# Altium PCB Full_Power_Board.PcbDoc
Units mil, origin at the board's own origin, x right, y up, seen from the top; angles counter-clockwise.
Board outline 6000 x 2850 mil, 4 copper layers (Signal Layer 1, Power Plane, Ground Plane, Signal Layer 2), stack 33.234 mil thick; 140 components, 95 nets, 531 pads, 92 vias.
Unrouted connection lines stored in the file: 1.
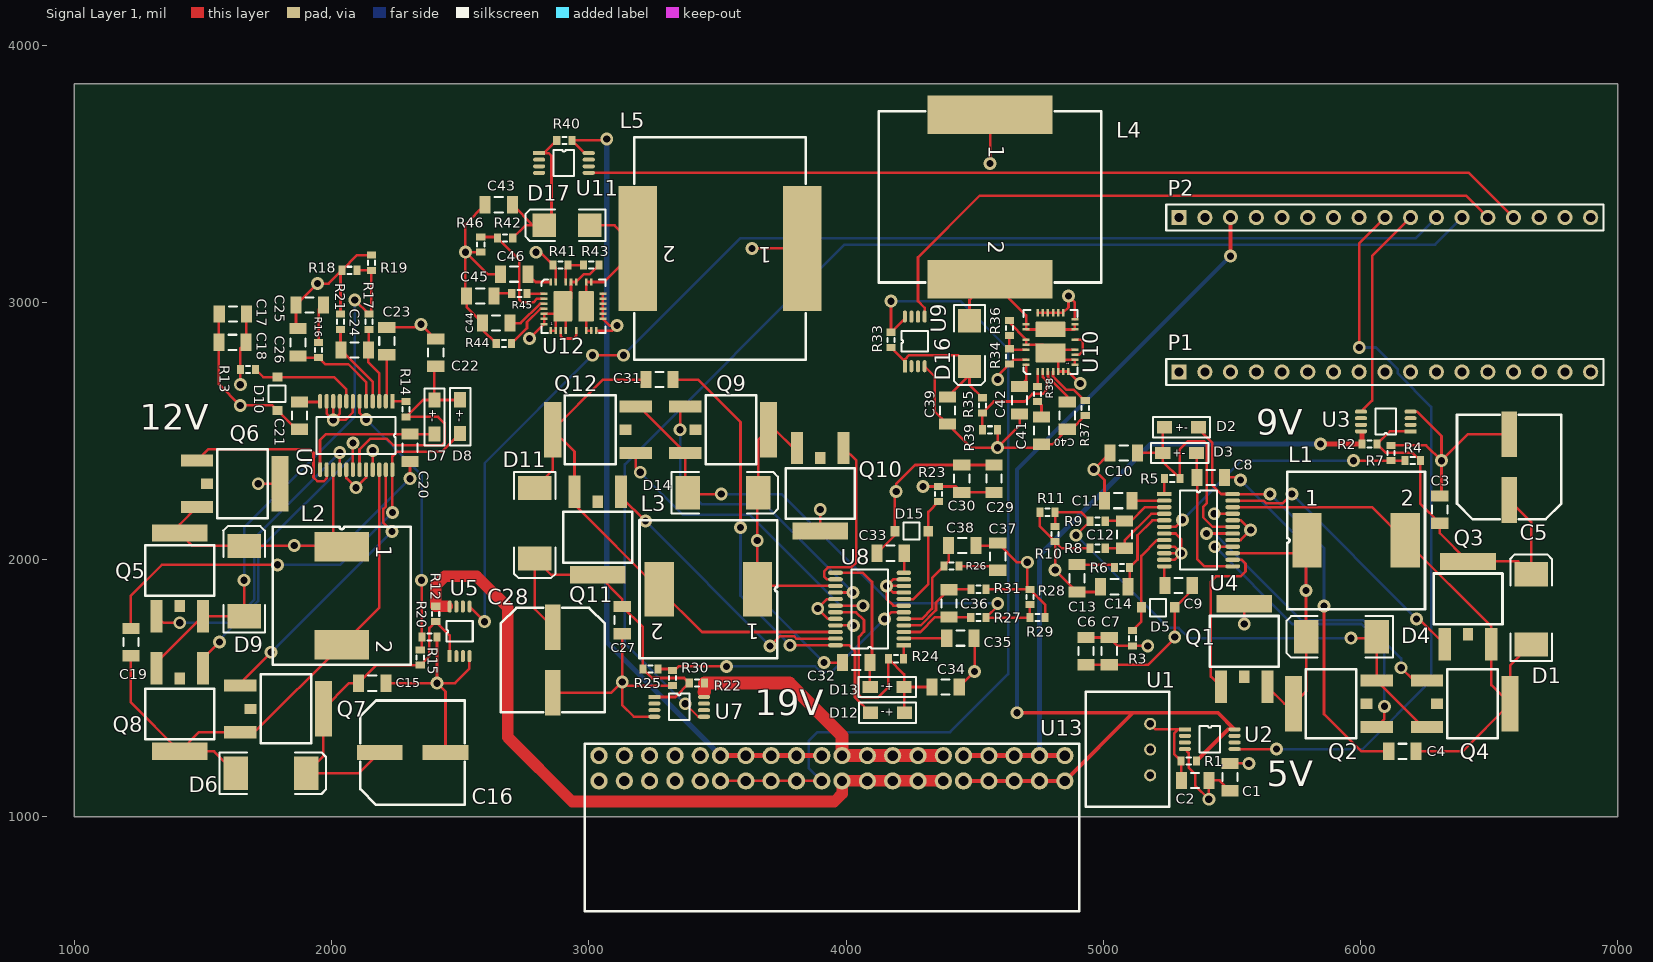
[diagram p0: Signal Layer 1 view]
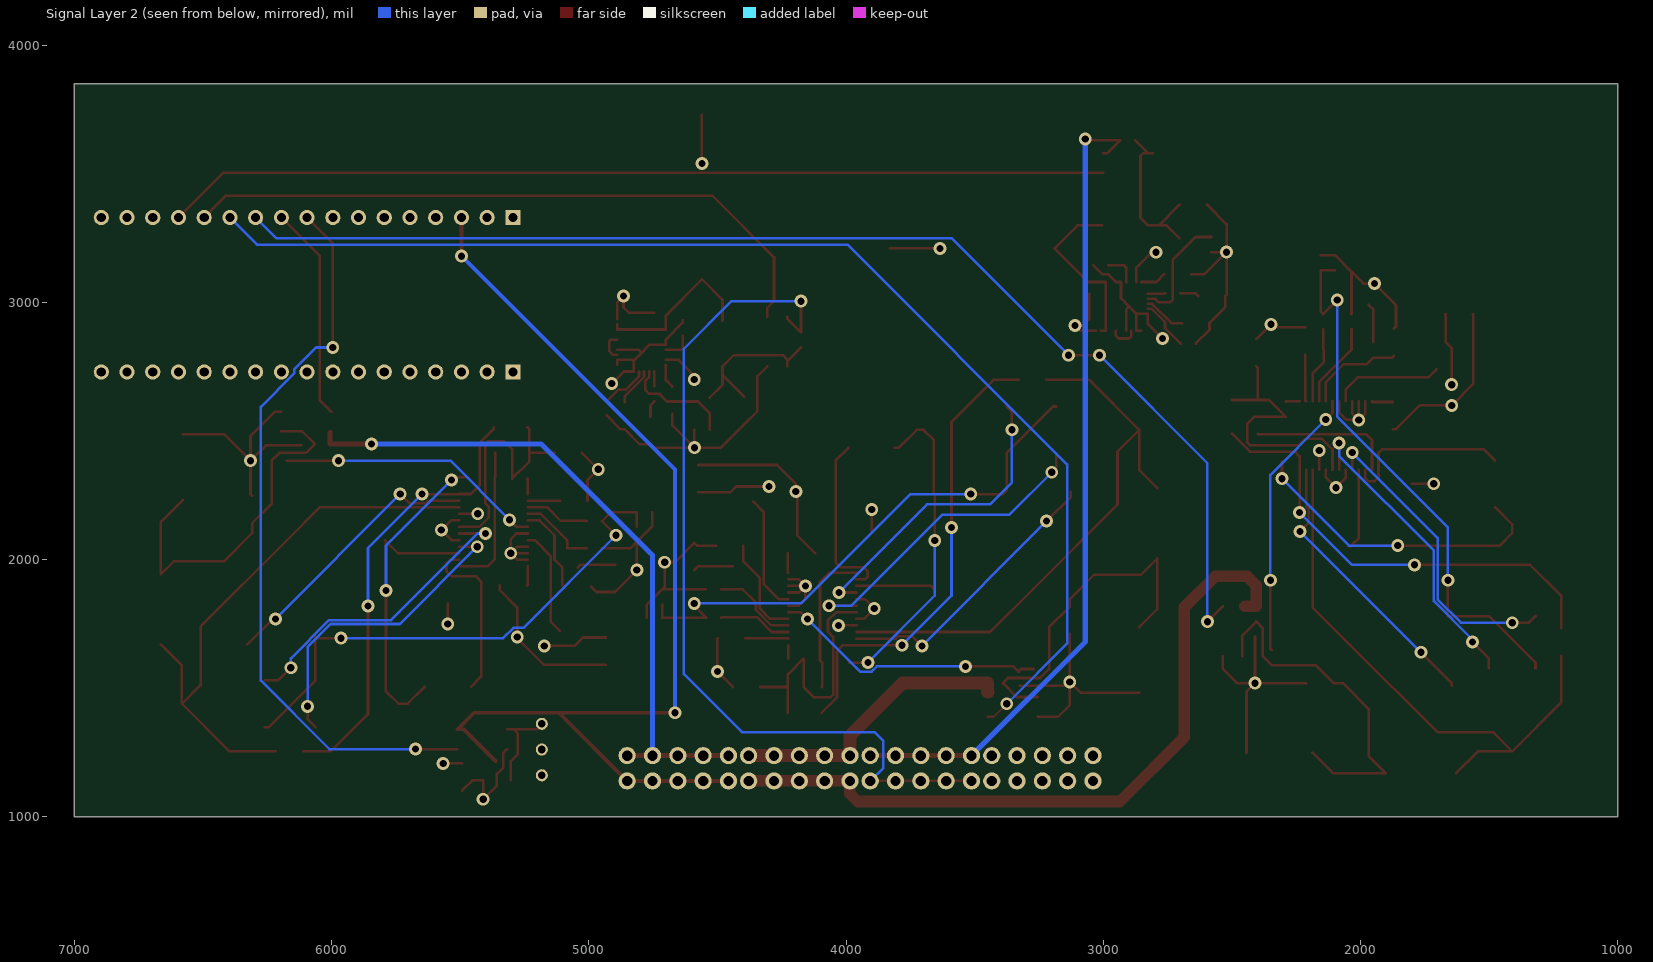
[diagram p1: Signal Layer 2 view, seen from below]
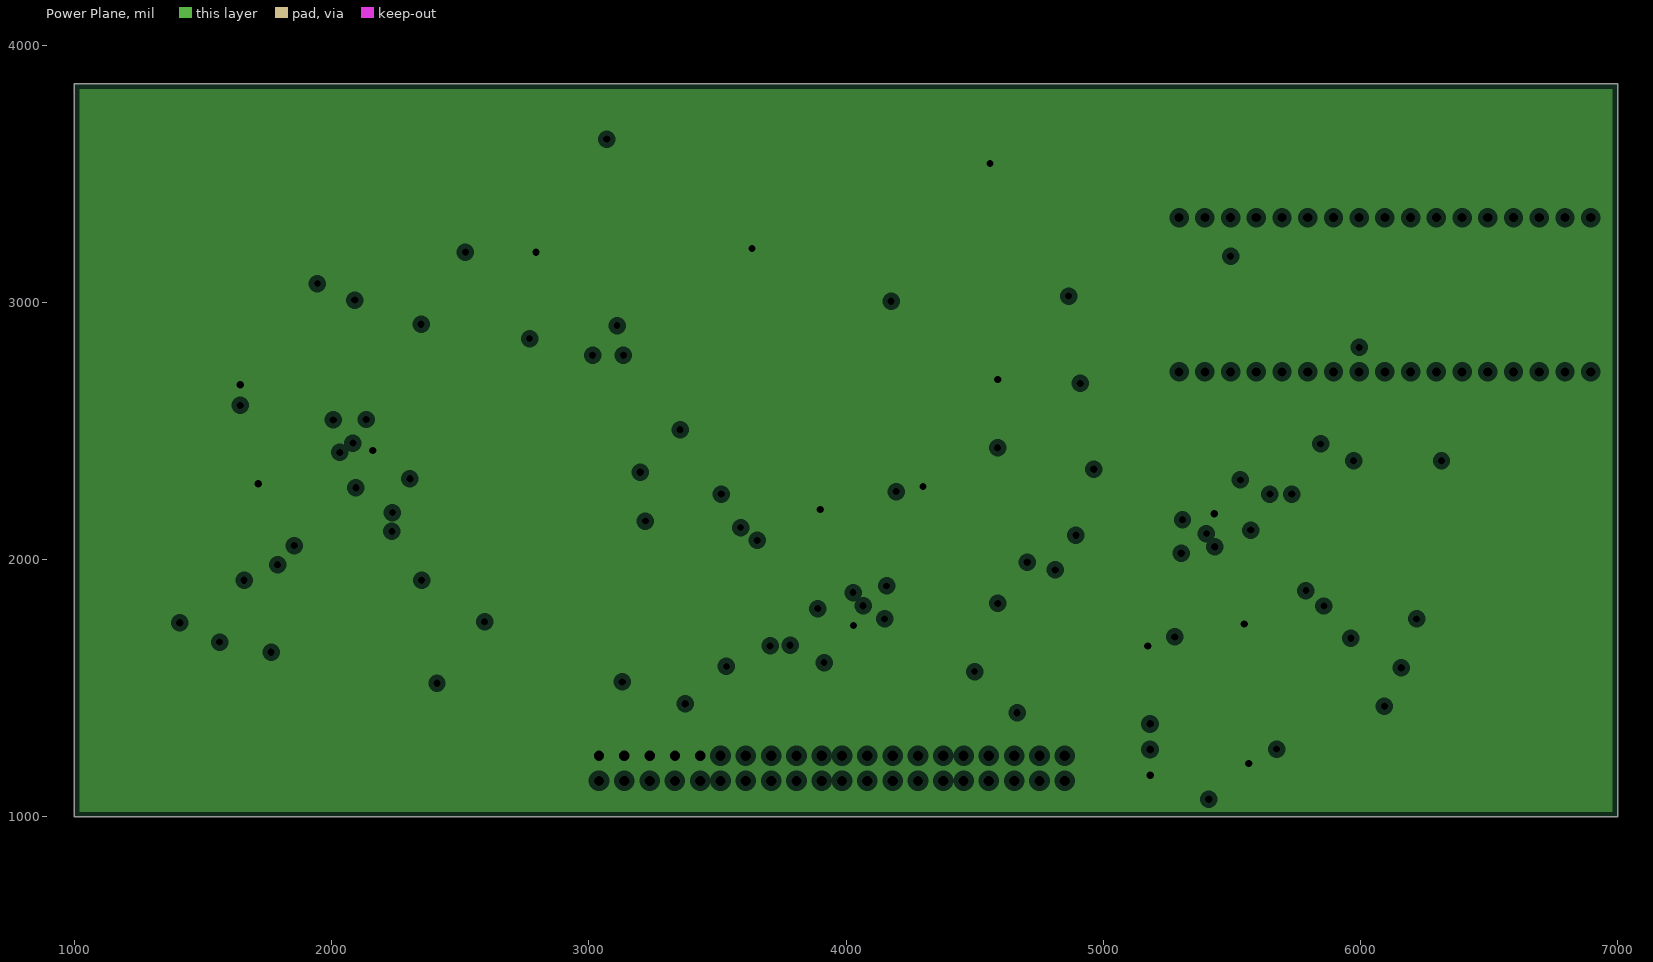
[diagram p2: Power Plane, clearances drawn from the general rule]
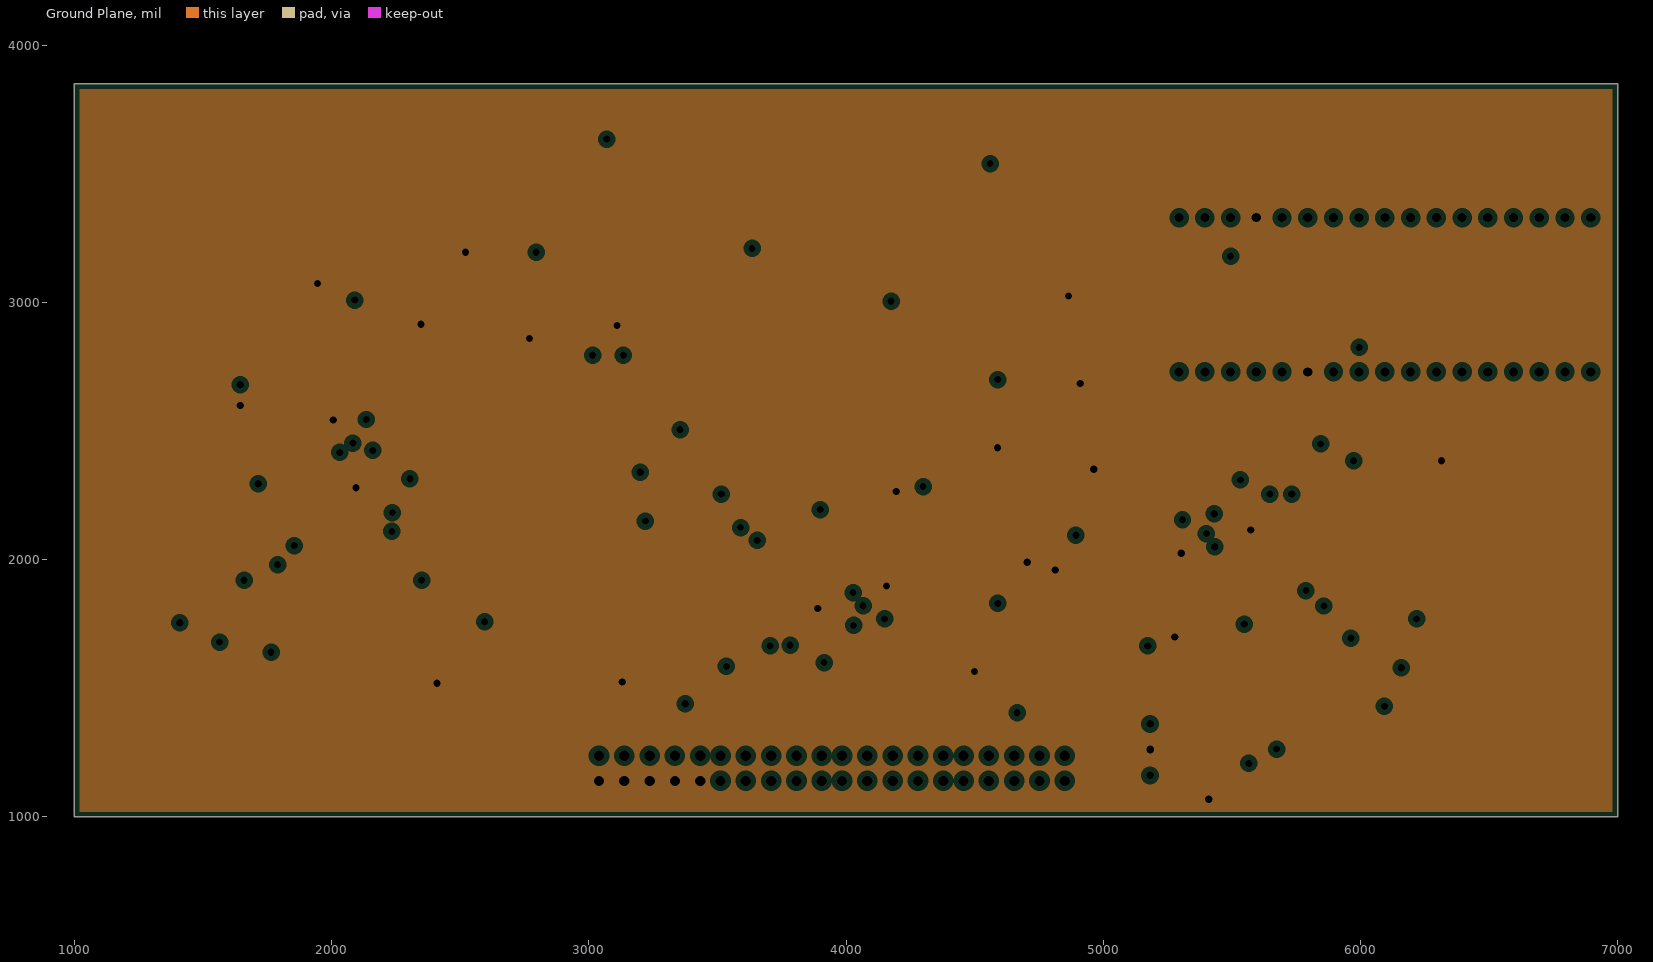
[diagram p3: Ground Plane, clearances drawn from the general rule]

## Layer stack, top to bottom
Top Solder: solder mask 0.4, Solder Resist, Dk 3.5
Signal Layer 1: signal copper 1.4
Dielectric 1: core 12.6, FR-4, Dk 4.8
Power Plane: plane copper 1.417, net 14.8V
Dielectric 3: prepreg 5, Dk 4.2
Ground Plane: plane copper 1.417, net GND
Dielectric 4: core 10, Dk 4.2
Signal Layer 2: signal copper 1.4
Bottom Solder: solder mask 0.4, Solder Resist, Dk 3.5

## Board outline
1000,1000 7000,1000 7000,3850 1000,3850

## Design rules (kind name [scope] priority, off if disabled: settings)
Clearance [All] p1: gap=5 ignorepadtopadclearanceinfootprint=FALSE
PlaneClearance [All] p1: clearance=20
PlaneConnect [All] p1: planeconnectstyle=Relief reliefexpansion=20 reliefentries=4 reliefconductorwidth=10 reliefairgap=10
PolygonConnect [All] p1: connectstyle=Relief reliefconductorwidth=10 reliefentries=4 polygonreliefangle="90 Angle" airgapwidth=10
RoutingVias [All] p1: holewidth=28 width=50 viastyle="Through Hole" minholewidth=28 minwidth=50 maxholewidth=28 maxwidth=50
SolderMaskExpansion [All] p1: expansion=4
Width [All] p1: maxlimit=50 minlimit=10 preferedwidth=10
28 further rules are at their usual default settings.

## Classes and differential pairs
component class Full_Power_Board: U13
component class Arduino: P1 P2
component class 48V: C43 C44 C45 C46 D17 L5 R40 R41 R42 R43 R44 R45 R46 U11 U12
component class 48V_0.5A: C39 C40 C41 C42 D16 L4 R33 R34 R35 R36 R37 R38 R39 U9 U10
component class 19V: C27 C28 C29 C30 C31 C32 C33 C34 C35 C36 C37 C38 D11 D12 D13 D14 D15 L3 Q9 Q10 Q11 Q12 R22 R23 R24 R25 R26 R27 R28 R29 R30 R31 U7 U8
component class 12V: C15 C16 C17 C18 C19 C20 C21 C22 C23 C24 C25 C26 D6 D7 D8 D9 D10 L2 Q5 Q6 Q7 Q8 R12 R13 R14 R15 R16 R17 R18 R19 R20 R21 U5 U6
component class 9V: C3 C4 C5 C6 C7 C8 C9 C10 C11 C12 C13 C14 D1 D2 D3 D4 D5 L1 Q1 Q2 Q3 Q4 R2 R3 R4 R5 R6 R7 R8 R9 R10 R11 U3 U4
component class 5V: C1 C2 R1 U1 U2

## Components (designator, comment, footprint, x,y, rotation, side; value= is the part's Value field where it differs from the comment)
C1 "10uF" C1206 5492.32,1155 r90 top
C2 "10uF" C1206 5357.32,1141.85 r180 top
C3 "Cap Semi" C1206 6308.15,2195 r270 top value=22u
C4 "Cap Semi" C1206 6163.15,1255 r180 top value=0.22u
C5 "390uF" PCV1E391MCL2GS 6578.15,2360 r180 top
C6 "Cap Semi" C1206 4933.15,1644.53 r90 top value=27u
C7 "Cap Semi" C1206 5023.15,1644.53 r90 top value=3.3u
C8 "Cap Semi" C1206 5418.15,2320 r180 top value=0.22u
C9 "Cap Semi" C1206 5293.15,1900 r180 top value=0.001u
C10 "Cap Semi" C1206 5080,2415 r0 top value=4.7u
C11 "Cap Semi" C1206 5058.15,2229.53 r0 top value=0.001u
C12 "Cap Semi" C1206 5083.15,2097.68 r90 top value=100p
C13 "Cap Semi" C1206 4898.15,1927.68 r90 top value=0.01u
C14 "Cap Semi" C1206 5043.15,1894.53 r0 top value=100p
C15 "Cap Semi" C1206 2158.15,1520 r180 top value=22u
C16 "390uF" PCV1E391MCL2GS 2315,1250 r90 top
C17 "Cap Semi" C1206 1616.85,2955 r0 top value=27u
C18 "Cap Semi" C1206 1615,2845 r0 top value=3.3u
C19 "Cap Semi" C1206 1220,1680 r90 top value=0.22u
C20 "Cap Semi" C1206 2305,2435 r90 top value=0.22u
C21 "Cap Semi" C1206 1875,2560 r90 top value=0.001u
C22 "Cap Semi" C1206 2405,2805 r270 top value=4.7u
C23 "Cap Semi" C1206 2215,2850 r270 top value=0.001u
C24 "Cap Semi" C1206 2090,2815 r0 top value=100p
C25 "Cap Semi" C1206 1915,2990 r0 top value=0.01u
C26 "Cap Semi" C1206 1870,2845 r270 top value=100p
C27 "Cap Semi" C1206 3130,1765 r90 top value=22u
C28 "390uF" PCV1E391MCL2GS 2860,1610 r0 top
C29 "Cap Semi" C1206 4575,2315 r270 top value=27u
C30 "Cap Semi" C1206 4450,2315 r270 top value=3.3u
C31 "Cap Semi" C1206 3275,2700 r0 top value=0.22u
C32 "Cap Semi" C1206 4040,1600 r0 top value=0.22u
C33 "Cap Semi" C1206 4173.15,2025 r0 top value=0.001u
C34 "Cap Semi" C1206 4386.85,1505 r180 top value=4.7u
C35 "Cap Semi" C1206 4445,1695 r180 top value=0.001u
C36 "Cap Semi" C1206 4400,1830 r270 top value=100p
C37 "Cap Semi" C1206 4590,2011.85 r270 top value=0.01u
C38 "Cap Semi" C1206 4451.85,2055 r180 top value=100p
C39 "Cap Semi" C1206 4395,2580 r90 top value=10u
C40 "Cap Semi" C1206 4860,2560 r90 top value=0.01u
C41 "Cap Semi" C1206 4760,2501.85 r90 top value=0.01u
C42 "Cap Semi" C1206 4675,2620 r90 top value=4.7u
C43 "Cap Semi" C1206 2650,3380 r0 top value=10u
C44 "Cap Semi" C1206 2640,2920 r0 top value=0.01u
C45 "Cap Semi" C1206 2578.15,3025 r0 top value=0.01u
C46 "Cap Semi" C1206 2710,3110 r0 top value=4.7u
D1 "MBRS340" SMC 6663.15,1806.81 r90 top
D2 "1N5819HW" 1N5819HW 5304.06,2515 r0 top
D3 "1N5819HW" 1N5819HW 5297.2,2415 r0 top
D4 "MBRS340" SMC 5926.34,1700 r180 top
D5 "MMSZ5230B" MMSZ5230B 5213.15,1815 r180 top
D6 "MBRS340" SMC 1765,1170 r0 top
D7 "1N5819HW" 1N5819HW 2400,2555 r270 top
D8 "1N5819HW" 1N5819HW 2500,2555.94 r270 top
D9 "MBRS340" SMC 1660,1916.81 r90 top
D10 "MMSZ5230B" MMSZ5230B 1790,2645 r90 top
D11 "MBRS340" SMC 2790,2141.81 r270 top
D12 "1N5819HW" 1N5819HW 4160.94,1405 r180 top
D13 "1N5819HW" 1N5819HW 4160,1505 r180 top
D14 "MBRS340" SMC 3521.81,2260 r0 top
D15 "MMSZ5230B" MMSZ5230B 4255,2110 r0 top
D16 "MBRS360" SMB 4480,2840 r270 top
D17 "MBRS360" SMB 2915,3300 r180 top
L1 "SRR1240-4R7MCT" SRR1240-4R7M 5983.15,2075 r0 top
L2 "SRR1240-4R7MCT" SRR1240-4R7M 2040,1860 r270 top
L3 "SRR1240-4R7MCT" SRR1240-4R7M 3465,1885 r180 top
L4 "IHLP-6767DZ-11" IHLP-6767DZ-11 4560,3730 r270 top
L5 "IHLP-6767DZ-11" IHLP-6767DZ-11 3829.76,3210 r180 top
P1 "Header 17" HDR1X17 5295,2730 r0 top
P2 "Header 17" HDR1X17 5295,3330 r0 top
Q1 "BUK6212-40C" BUK6212-40C 5457.6,1505.63 r0 top
Q2 "BUK6212-40C" BUK6212-40C 6062.52,1349.45 r90 top
Q3 "BUK6212-40C" BUK6212-40C 6327.6,1670.63 r0 top
Q4 "BUK6212-40C" BUK6212-40C 6258.78,1530.55 r270 top
Q5 "BUK6212-40C" BUK6212-40C 1319.45,1780.63 r0 top
Q6 "BUK6212-40C" BUK6212-40C 1477.17,2385.55 r270 top
Q7 "BUK6212-40C" BUK6212-40C 1645.63,1510.55 r270 top
Q8 "BUK6212-40C" BUK6212-40C 1500.55,1577.83 r180 top
Q9 "BUK6212-40C" BUK6212-40C 3375.63,2595.55 r270 top
Q10 "BUK6212-40C" BUK6212-40C 3990.55,2434.37 r180 top
Q11 "BUK6212-40C" BUK6212-40C 3125.55,2264.37 r180 top
Q12 "BUK6212-40C" BUK6212-40C 3182.83,2414.45 r90 top
R1 "Res3" J1-0603 5332.32,1216.85 r0 top value=5m
R2 "Res3" J1-0603 6035.47,2450 r180 top value=2.5m
R3 "Res3" J1-0603 5113.15,1694.53 r270 top value=51k
R4 "Res3" J1-0603 6203.15,2385 r0 top value=205k
R5 "Res3" J1-0603 5268.15,2315 r180 top value=100k
R6 "Res3" J1-0603 5073.15,1969.53 r0 top value=100k
R7 "Res3" J1-0603 6118.15,2415 r270 top value=20k
R8 "Res3" J1-0603 4978.15,2044.53 r180 top value=100
R9 "Res3" J1-0603 4978.15,2149.53 r180 top value=100
R10 "Res3" J1-0603 4813.15,2099.53 r90 top value=0.018
R11 "Res3" J1-0603 4783.15,2184.53 r0 top value=0.018
R12 "Res3" J1-0603 2405,1789.53 r90 top value=2.5m
R13 "Res3" J1-0603 1675,2740 r180 top value=51k
R14 "Res3" J1-0603 2290,2585 r90 top value=100k
R15 "Res3" J1-0603 2345,1620 r270 top value=113k
R16 "Res3" J1-0603 1950,2815 r270 top value=100k
R17 "Res3" J1-0603 2145,2925 r90 top value=100
R18 "Res3" J1-0603 2070,3125 r0 top value=0.018
R19 "Res3" J1-0603 2155,3154.53 r270 top value=0.018
R20 "Res3" J1-0603 2380.47,1700 r180 top value=8.06k
R21 "Res3" J1-0603 2035,2925 r90 top value=100
R22 "Res3" J1-0603 3420,1520 r0 top value=2m
R23 "Res3" J1-0603 4360,2255 r90 top value=51k
R24 "Res3" J1-0603 4194.53,1615 r0 top value=100k
R25 "Res3" J1-0603 3240,1575 r180 top value=113k
R26 "Res3" J1-0603 4410,1975 r180 top value=100k
R27 "Res3" J1-0603 4514.53,1775 r0 top value=100
R28 "Res3" J1-0603 4715,1855 r270 top value=0.018
R29 "Res3" J1-0603 4744.53,1775 r180 top value=0.018
R30 "Res3" J1-0603 3325,1540 r90 top value=2K
R31 "Res3" J1-0603 4515,1885 r0 top value=100
R33 "Res3" J1-0603 4175,2854.53 r90 top value=10m
R34 "Res3" J1-0603 4635,2790.47 r270 top value=392k
R35 "Res3" J1-0603 4530,2600 r90 top value=464k
R36 "Res3" J1-0603 4635,2900.47 r270 top value=53.6k
R37 "Res3" J1-0603 4930,2590 r90 top value=41.2k
R38 "Res3" J1-0603 4745,2644.53 r90 top value=10k
R39 "Res3" J1-0603 4560,2505 r180 top value=15.8k
R40 "Res3" J1-0603 2905,3630 r0 top value=10m
R41 "Res3" J1-0603 2890,3145 r180 top value=392k
R42 "Res3" J1-0603 2675,3250 r0 top value=464k
R43 "Res3" J1-0603 3009.53,3145 r180 top value=53.6k
R44 "Res3" J1-0603 2670,2840 r0 top value=41.2k
R45 "Res3" J1-0603 2730,3035 r0 top value=10k
R46 "Res3" J1-0603 2580,3225 r90 top value=15.8k
U1 "R-78E-0.5" R-78E-0.5 5261.06,1035.47 r90 top
U2 "AD8217" AD8217 5317.56,1340.59 r0 top
U3 "AD8217" AD8217 6195,2498.82 r180 top
U4 "LTC3780EG#PBF" "LTC3780 24-Leaqd Plastic SSOP" 5237.4,2255.32 r0 top
U5 "AD8217" AD8217 2459.41,1625 r90 top
U6 "LTC3780EG#PBF" "LTC3780 24-Leaqd Plastic SSOP" 2236.77,2615.75 r270 top
U7 "AD8217" AD8217 3255,1466.18 r0 top
U8 "LTC3780EG#PBF" "LTC3780 24-Leaqd Plastic SSOP" 4225,1667.64 r180 top
U9 "AD8217" AD8217 4228.82,2752.09 r90 top
U10 "LT3958EUHE#PBF" LT3958 4889.49,2757.2 r90 top
U11 "AD8217" AD8217 2807.09,3580.59 r0 top
U12 "LT3958EUHE#PBF" LT3958 2852.2,2890.51 r0 top
U13 "Power Connections" "Molex Connector" 3039.72,1238.43 r0 top

## Footprints (in the part's own frame and the unit in brackets; to place one, negate y for a bottom-side part, rotate by r counter-clockwise, add the part's x,y. Pads: shape width x height; smd on the part's side, far side on the other; paste and mask are expansions set on the pad)
1N5819HW [mm]
  rect 1.5x1.2 smd: 1(-1.675,0) 2(1.675,0)
  silkscreen extent -2.83,-1 2.83,1
AD8217 [mm]
  rect 1.2x0.4 smd: 1(0,0)
  oval 1.2x0.4 smd: 2(0,-0.65) 3(0,-1.3) 4(0,-1.95) 5(4.9,-1.95) 6(4.9,-1.3) 7(4.9,-0.65) 8(4.9,0)
  silkscreen extent 1.43,-2.28 3.47,0.33
BUK6212-40C [mm]
  rect 1.2x3.2 smd: 1(0,0) 2(4.6,0)
  rect 1x1.2 smd: 3(2.3,1)
  rect 5.5x1.7 smd: 3(2.3,8.2)
  silkscreen extent -1.1,2 5.7,7
C1206 [mm] "Chip Capacitor, Body 3.2x1.6mm, IPC High Density"
  rect 1.1x1.7 smd: 1(-1.35,0) 2(1.35,0)
  silkscreen extent -0.4,-0.75 0.4,0.75, body extent -1.7,-0.9 1.7,0.9, height 1.3
HDR1X17 [mm] "Connector; Header; 17 Position"
  rect 1.5x1.5 hole 0.9: 1(0,0)
  round 1.5 hole 0.9: 2(2.54,0) 3(5.08,0) 4(7.62,0) 5(10.16,0) 6(12.7,0) 7(15.24,0) 8(17.78,0) 9(20.32,0) 10(22.86,0) 11(25.4,0) 12(27.94,0) 13(30.48,0) 14(33.02,0) 15(35.56,0) 16(38.1,0) 17(40.64,0)
  silkscreen extent -1.27,-1.27 41.91,1.27
IHLP-6767DZ-11 [mm]
  rect 3.825x12.32 smd: 1(0,0) 2(16.25,0)
  silkscreen extent -0.33,-10.97 16.57,10.97
J1-0603 [mm] "Chip Resistor, Body 1.6x0.8mm, IPC High Density"
  rect 0.7x0.9 smd: 1(-0.75,0) 2(0.75,0)
  silkscreen extent -0.2,-0.35 0.2,0.35, body extent -0.85,-0.48 0.85,0.48, height 0.9
LT3958 [mm]
  rect 0.25x0.7 smd mask+0.085: 1(0,0)
  rect 0.25x0.7 smd: 2(0.5,0) 3(1,0) 4(1.5,0) 6(2.5,0) 8(3.5,0) 9(4,0) 10(4.5,0) 20(4,4.8) 21(3.5,4.8) 23(2.5,4.8) 24(2,4.8) 25(1.5,4.8) 27(0.5,4.8) 28(0,4.8)
  rect 0.7x0.25 smd: 12(5.15,1.15) 13(5.15,1.65) 14(5.15,2.15) 15(5.15,2.65) 16(5.15,3.15) 17(5.15,3.65) 30(-0.65,3.65) 31(-0.65,3.15) 32(-0.65,2.65) 33(-0.65,2.15) 34(-0.65,1.65) 35(-0.65,1.15)
  rect 0.7x0.25 smd mask+0.085: 36(-0.65,0.65)
  rrect10% 1.875x3 smd: 37(1.188,2.4)
  rrect10% 1.53x3 smd paste+0: 38(3.5,2.4)
  silkscreen extent -0.9,-0.25 5.4,5.05
"LTC3780 24-Leaqd Plastic SSOP" [mm]
  rect 1.45x0.42 smd: 1(0,0)
  oval 1.45x0.42 smd: 2(0,-0.65) 3(0,-1.3) 4(0,-1.95) 5(0,-2.6) 6(0,-3.25) 7(0,-3.9) 8(0,-4.55) 9(0,-5.2) 10(0,-5.85) 11(0,-6.5) 12(0,-7.15) 13(6.75,-7.15) 14(6.75,-6.5) 15(6.75,-5.85) 16(6.75,-5.2) 17(6.75,-4.55) 18(6.75,-3.9) 19(6.75,-3.25) 20(6.75,-2.6) 21(6.75,-1.95) 22(6.75,-1.3) 23(6.75,-0.65) 24(6.75,0)
  silkscreen extent 1.56,-7.48 5.19,0.33
MMSZ5230B [mm]
  rect 0.9x1.025 smd: 1(-1.65,0) 2(1.65,0)
  silkscreen extent -0.8,-0.8 0.8,0.9
"Molex Connector" [mm]
  round 1.7 hole 1.02: 1(0,0) 1(2.5,0) 1(5,0) 1(7.5,0) 1(10,0) 2(0,-2.5) 2(2.5,-2.5) 2(5,-2.5) 2(7.5,-2.5) 2(10,-2.5) 3(12,0) 3(14.5,0) 3(17,0) 3(19.5,0) 3(22,0) 4(12,-2.5) 4(14.5,-2.5) 4(17,-2.5) 4(19.5,-2.5) 4(22,-2.5) 5(24,0) 5(26.5,0) 5(29,0) 5(31.5,0) 5(34,0) 6(24,-2.5) 6(26.5,-2.5) 6(29,-2.5) 6(31.5,-2.5) 6(34,-2.5) 7(36,0) 7(38.5,0) 7(41,0) 7(43.5,0) 7(46,0) 8(36,-2.5) 8(38.5,-2.5) 8(41,-2.5) 8(43.5,-2.5) 8(46,-2.5)
  silkscreen extent -1.43,-15.38 47.43,1.17, body extent -1.3,-15.24 47.3,1.04, height 7.59
PCV1E391MCL2GS [mm]
  rect 1.5x4.5 smd: 1(0,3.25) 2(0,-3.25)
  silkscreen extent -5.15,-5.15 5.15,5.15
R-78E-0.5 [mm]
  round 1.2 hole 0.762: 1(3.21,2) 2(5.75,2) 3(8.29,2)
  silkscreen extent 0.13,0.13 11.48,8.37
SMB [mm] "DO-214-AA/SMB; 2 C-Bend Leads; Body 5.3 x 3.6 mm, inc. leads (LxW)"
  rect 2.3x2.3 smd: 1(-2.25,0) 2(2.25,0)
  silkscreen extent -3.8,-1.55 4.1,1.55
SMC [mm] "DO-214-AB/SMC; 2 C-Bend Leads; Body 7.9 x 5.9 mm, inc. leads (LxW)"
  rect 2.4x3.3 smd: 1(-3.475,0) 2(3.475,0)
  silkscreen extent -5.07,-2.05 5.43,2.05
SRR1240-4R7M [mm]
  rect 2.9x5.4 smd: 1(-4.85,0) 2(4.85,0)
  silkscreen extent -6.8,-6.8 6.8,6.8

## Part data
C1 C2: library part "Cap Semi", "Capacitor (Semiconductor SIM Model)", LatestRevisionDate=29-May-2009, LatestRevisionNote="IPC-7351 Footprint Added.", PackageDescription="Chip Capacitor", PackageReference=C1206, Published=8-Jun-2000, Publisher="Altium Limited"
C3 C4 C6 C7 C8 C9 C10 C11 C12 C13 C14 C15 C17 C18 C19 C20 C21 C22 C23 C24 C25 C26 C27 C29 C30 C31 C32 C33 C34 C35 C36 C37 C38 C39 C40 C41 C42 C43 C44 C45 C46: "Capacitor (Semiconductor SIM Model)", LatestRevisionDate=29-May-2009, LatestRevisionNote="IPC-7351 Footprint Added.", PackageDescription="Chip Capacitor", PackageReference=C1206, Published=8-Jun-2000, Publisher="Altium Limited"
C5 C16 C28: library part PCV1E391MCL2GS, "Aluminum Capacitor"
D1 D4 D6 D9 D11 D14: library part Diode, "Default Diode", Code_JEDEC=DO-214-AB, LatestRevisionDate=17-Jul-2002, LatestRevisionNote="Re-released for DXP Platform.", PackageDescription="DO-214-AB/SMC; 2 C-Bend Leads; Body 7.9 x 5.9 mm, inc. leads (LxW)", PackageReference=SMC, PackageVersion=Sep-1996, Published=8-Jun-2000, Publisher="Altium Limited"
D2 D3 D7 D8 D12 D13: "1A Schottky Barrier Rectifier"
D5 D10 D15: "Zener Diode"
D16 D17: library part "D Schottky", "Schottky Diode", Code_JEDEC=DO-214-AA, LatestRevisionDate=17-Jul-2002, LatestRevisionNote="Re-released for DXP Platform.", PackageDescription="DO-214-AA/SMB; 2 C-Bend Leads; Body 5.3 x 3.6 mm, inc. leads (LxW)", PackageReference=SMB, Published=8-Jun-2000, Publisher="Altium Limited"
L1 L2 L3 L4 L5: "Inductor"
P1 P2: "Header, 17-Pin", LatestRevisionDate=17-Jul-2002, LatestRevisionNote="Re-released for DXP Platform.", Publisher="Altium Limited"
Q1 Q2 Q3 Q4 Q5 Q6 Q7 Q8 Q9 Q10 Q11 Q12: "N-Channel TrenchMOS Intermediate Level FET"
R1 R2 R3 R4 R5 R6 R7 R8 R9 R10 R11 R12 R13 R14 R15 R16 R17 R18 R19 R20 R21 R22 R23 R24 R25 R26 R27 R28 R29 R30 R31 R33 R34 R35 R36 R37 R38 R39 R40 R41 R42 R43 R44 R45 R46: "Resistor", LatestRevisionDate=29-May-2009, LatestRevisionNote="IPC-7351 Footprint Added.", PackageDescription="Chip Resistor", PackageReference=J1-0603, Published=8-Jun-2000, Publisher="Altium Limited"
U1: "DC/DC Converter"
U2 U3 U5 U7 U9 U11: "Current Shunt Moniter"
U4 U6 U8: "Buck-boost Controller, Constant Frequency, Current Mode Control with Power Good Output, 24-pin SOP (G-24), -40 to 85 degC, Pb-Free", Frequency Sync Range="200kHz - 400kHz", Manufacturer="Linear Technology", PackageDesciption="24-Pin Plastic SSOP, Body 8.2 x 5.3 mm, Pitch 0.65 mm", Supplier Part Number 1=LTC3780EG#PBF-ND, ComponentLink1Description="Manufacturer URL", ComponentLink1URL=http://www.linear.com/, ComponentLink2Description=Datasheet, ComponentLink2URL=http://cds.linear.com/docs/en/datasheet/3780ff.pdf, ComponentLink3Description="Package Specification", ComponentLink3URL=http://cds.linear.com/docs/en/packaging/SSOP_24_05-08-1640.pdf, DatasheetVersion="Rev. F", Mounting Technology="Surface Mount", Number of Outputs=1, PackageReference=G-24, PackageVersion=Jun-10, PartNumber=LTC3780EG#PBF, RoHS=TRUE, Supplier 1=Digi-Key, Supplier 2=Farnell, Supplier 3=Newark, Supplier Part Number 2=1273545, Supplier Part Number 3=56M8395
U10 U12: "LT3958", Frequency Adjust Range="100kHz - 1MHz", Manufacturer="Linear Technology", Supplier Part Number 1=LT3958EUHE#PBF-ND, ComponentLink1Description="Manufacturer URL", ComponentLink1URL=http://www.linear.com/, ComponentLink2Description=Datasheet, ComponentLink2URL=http://cds.linear.com/docs/en/datasheet/3958f.pdf, ComponentLink3Description="Package Specification", ComponentLink3URL=http://cds.linear.com/docs/en/packaging/QFN_28_05-08-1836.pdf, Mounting Technology="Surface Mount", Number of Outputs=1, PackageDescription="28-Pin Plastic QFN, Body 5 x 6 mm, Pitch 0.5 mm", PackageReference=UHE-36, PackageVersion="Rev. D, 02/2012", PartNumber=LT3958EUHE#PBF, RoHS=TRUE, Supplier 1=Digi-Key, Supplier 2=Farnell, Supplier 3=Newark, Supplier Part Number 2=2294964, Supplier Part Number 3=78R9566
U13: library part "Molex Connector"

## Via types
v1: diameter 50, hole 28, Signal Layer 1 to Signal Layer 2, 92 vias

## Nets (pads, with @x,y where several pads share a name; then routed paths per layer and width w, separated by ;. In a path a pad name is that pad's centre, name@x,y a point inside that pad or via, vN(x,y) a via of type N, cw(c..) or ccw(c..) an arc to the next point about the centre after c; other vN are vias at no path point)
14.8V: C1.2 C6.2 C7.2 C17.2 C18.2 C29.2 C30.2 L4.1 L5.1 Q1.3@5548.15,1828.46 Q6.3@1800,2295 Q10.3@3900,2111.54 R3.2 R13.2 R23.2 R34.2 R41.2 U1.1 U4.21 U6.21 U8.21 U10.27 U12.27 U13.1 | length 2064.2
  Signal Layer 1 w10: v1(1645.47,2680.47) R13.2 1645.47,2822.32 C18.2 1668.15,2953.15 C17.2 ; v1(1715,2295) Q6.3@1800,2295 ; U6.21 v1(2160,2425) ; v1(2795,3195) 2795,3199.53 2800.47,3205 R41.2 2871.89,3133.58 U12.27 ; v1(3635,3210) L5.1 ; Q10.3@3900,2111.54 v1(3900,2195) ; U8.21 v1(4029.41,1744.41) ; v1(4299.53,2284.53) R23.2 4427.32,2284.53 C30.2 C29.2 ; v1(4560,3540) L4.1 ; v1(4590,2700) 4590,2715.94 R34.2 4650.94,2776.89 U10.27 ; C6.2 C7.2 5055.83,1665 R3.2 v1(5173.15,1665) ; v1(5431.69,2178.54) U4.21 ; C1.2 v1(5566.02,1208.15) ; v1(5548.15,1750) Q1.3@5548.15,1828.46
BG1-9V: Q4.1 U4.18 | length 1217.4
  Signal Layer 1 w10: v1(5401.38,2101.77) U4.18 ; v1(6158.15,1580) 6207.6,1530.55 Q4.1
  Signal Layer 2 w10: v1(5401.38,2101.77) 5432.06,2101.77 5468.74,2065.09 5468.74,2064.41 5768.15,1765 6009.36,1765 6158.15,1616.21 v1(6158.15,1580)
BG2-9V: Q2.1 U4.16 | length 1213.8
  Signal Layer 1 w10: v1(5433.74,2050.59) U4.16 ; Q2.1 6093.15,1380.08 v1(6093.15,1430)
  Signal Layer 2 w10: v1(5433.74,2050.59) 5734.33,1750 6003.15,1750 6093.15,1660 v1(6093.15,1430)
GND: C1.1 C2.1 C3.1 C5.2 C6.1 C7.1 C9.1 C10.1 C11.1 C13.1 C14.1 C15.1 C16.2 C17.1 C18.1 C21.1 C22.1 C23.1 C25.1 C26.1 C27.1 C28.2 C29.1 C30.1 C33.1 C34.1 C35.1 C37.1 C38.1 C39.1 C40.1 C41.1 C42.1 C43.1 C44.1 C45.1 C46.1 D5.1 D10.1 D15.1 P1.6 P2.4 R7.1 R8.2 R10.1 R11.1 R18.1 R19.1 R20.1 R21.2 R28.1 R29.1 R30.1 R31.2 R36.1 R37.1 R39.1 R43.1 R44.1 R46.1 U1.2 U2.4 U3.4 U4.7 U4.9 U4.10 U4.11 U4.17 U4.20 U5.4 U6.7 U6.9 U6.10 U6.11 U6.17 U6.20 U7.4 U8.7 U8.9 U8.10 U8.11 U8.17 U8.20 U9.4 U10.1 U10.2 U10.4 U10.10 U10.12 U10.13 U10.14 U10.15 U10.16 U10.17 U10.23 U10.24 U10.34 U10.35 U10.36 U10.37 U11.4 U12.1 U12.2 U12.4 U12.10 U12.12 U12.13 U12.14 U12.15 U12.16 U12.17 U12.23 U12.24 U12.34 U12.35 U12.36 U12.37 U13.2 | length 12973.4
  Signal Layer 1 w10: C17.1 1561.85,2953.15 C18.1 1561.85,2683.15 v1(1645,2600) 1770.04,2600 D10.1 1863.19,2506.85 C21.1 ; C26.1 1861.85,2906.3 C25.1 v1(1945,3073.15) 1988.62,3073.15 R18.1@2035,3119.53 ; U6.11 1980.87,2569.13 v1(2006.46,2543.54) ; U6.10 v1(2006.46,2543.54) ; U6.9 2032.05,2569.13 v1(2006.46,2543.54) ; R21.2 R18.1@2035,3119.53 ; U6.17 2057.64,2317.36 v1(2095,2280) 2134.41,2319.41 U6.20 ; U6.7 2083.23,2573.23 2053.54,2543.54 v1(2006.46,2543.54) ; R19.1 2099.53,3184.06 R18.1 R18.1@2035,3119.53 ; C15.1 v1(2410,1520) ; C23.1 2336.3,2903.15 v1(2348.15,2915) C22.1 ; R20.1 v1(2410,1520) ; C16.2 2442.95,1487.05 v1(2410,1520) ; U5.4 2536.18,1576.18 2480,1520 v1(2410,1520) ; R46.1 v1(2520.47,3195.47) ; C43.1 2520.47,3303.62 v1(2520.47,3195.47) ; R44.1 2586.85,2893.62 C44.1 2525,2981.85 C45.1 2520.47,3029.53 v1(2520.47,3195.47) ; C46.1 2605.95,3110 v1(2520.47,3195.47) ; v1(2770,2859.49) U12.36 U12.35 U12.34 2869.43,2955.47 U12.37@2871.89,2957.93 ; U12.1 U12.2 U12.37@2871.89,2957.93 ; C28.2 3087.05,1482.05 v1(3130,1525) ; U12.4 2911.26,2972.7 U12.37 ; U12.10 3090.51,2890.51 v1(3110,2910) 3080.75,2910 U12.12 U12.13 U12.14 U12.15 U12.16 U12.17 ; R43.1 3004.06,3110 2981.14,3110 U12.23 U12.24 2930.94,3016.99 U12.37 ; C27.1 v1(3130,1525) ; U7.4 3175.59,1389.41 3130,1435 v1(3130,1525) ; R30.1 3144.53,1510.47 v1(3130,1525) ; U8.20 3930,1770 v1(3890,1810) 3926.77,1846.77 U8.17 ; C33.1 4190.04,2095.04 D15.1 4190.04,2260.04 v1(4195,2265) 4195,2295 4268.15,2368.15 C30.1 C29.1 ; U8.7 4183.82,1821.18 4157.95,1847.05 v1(4157.95,1897.95) ; U8.9 4183.54,1872.36 v1(4157.95,1897.95) ; U8.10 v1(4157.95,1897.95) ; U8.11 4183.54,1923.54 v1(4157.95,1897.95) ; U9.4 4345,2712.68 4345,2576.85 C39.1 4486.38,2435.47 v1(4589.53,2435.47) ; C34.1 v1(4500,1565) 4500,1693.15 C35.1 ; C38.1 4580,2055 C37.1 4665,1990 v1(4705,1990) 4705,1894.53 R28.1@4714.53,1885 ; R31.2 R28.1@4714.53,1885 ; R39.1 v1(4589.53,2435.47) ; R36.1 4635,2921.81 4700.51,2856.3 U10.23 U10.24 4763.01,2835.94 U10.37 ; C42.1 4675,2520.95 v1(4589.53,2435.47) ; U10.17 U10.16 U10.15 U10.14 U10.13 U10.12 4865,2980.75 v1(4865,3025) 4889.49,3000.51 U10.10 ; R11.1 4753.62,2129.53 R10.1 ; R29.1 4774.06,1825.47 R28.1 R28.1@4714.53,1885 ; U10.1 U10.2 U10.37@4822.07,2776.89 ; U10.4 4807.3,2816.26 U10.37 ; v1(4910.51,2685) U10.36 U10.35 U10.34 4824.53,2774.43 U10.37@4822.07,2776.89 ; R37.1 4876.38,2506.85 C40.1 4801.85,2448.7 C41.1 4746.77,2435.47 v1(4589.53,2435.47) ; C6.1 C7.1 5174.53,1591.38 5278.15,1695 v1(5278.15,1700) v1(5278.15,1700) D5.1 5346.3,1883.19 C9.1 ; R8.2 4838.62,2044.53 R10.1 ; C14.1 4970,1874.53 C13.1 4813.15,1959.53 v1(4813.15,1960) R10.1 ; C11.1 5005,2309.45 v1(4963.15,2351.3) C10.1 ; U4.11 5277.56,1999.41 v1(5303.15,2025) ; U4.10 v1(5303.15,2025) ; U4.9 5277.56,2050.59 v1(5303.15,2025) ; U4.7 5281.38,2101.77 5303.15,2080 v1(5303.15,2025) ; U2.4 5332.32,1249.06 5332.32,1191.85 5357.32,1166.85 5357.32,1121.85 v1(5410.47,1068.7) C2.1 5452.32,1141.85 C1.1 ; U4.17 5534.33,2076.18 v1(5573.15,2115) 5535.2,2152.95 U4.20 ; R7.1 6255.47,2444.53 v1(6315,2385) ; U3.4 6219.41,2575.59 6315,2480 v1(6315,2385) ; C3.1 6315,2255 v1(6315,2385) ; C5.2 6417.95,2487.95 v1(6315,2385) ; U12.37@2871.89,2957.93 U12.37 ; U10.37 U10.37@4822.07,2776.89
NetC2_2: C2.2 R1.1 U1.3 U2.1 | length 359.2
  Signal Layer 1 w10: U1.3 5203.58,1340.59 5291.06,1340.59 ; C2.2@5302.8,1143.23 R1.1 5275.47,1244.17 5275.47,1325 5291.06,1340.59 ; U2.1 5291.06,1340.59
NetC3_2: C3.2 C5.1 D1.2 Q3.3@6418.15,1993.46 R2.1 R4.2 U3.1 | length 1402.5
  Signal Layer 1 w10: U3.1 6113.82,2498.82 R2.1 6100,2415 6202.68,2415 R4.2 6232.68,2217.32 C3.2 6308.15,2103.46 6418.15,1993.46 6613.31,1993.46 D1.2 6663.15,2147.05 C5.1
NetC4_1: C4.1 D1.1 L1.2 Q3.2 Q4.3@6581.61,1440 U4.22 | length 2234
  Signal Layer 1 w10: U4.22 6044.96,2204.13 L1.2 6508.7,1740.39 Q3.2 6508.7,1512.91 Q4.3@6581.61,1440 ; C4.1 6396.61,1255 Q4.3@6581.61,1440 ; D1.1 6581.61,1588.46 Q4.3@6581.61,1440
NetC4_2: C4.2 D2.2 U4.24 | length 1740.4
  Signal Layer 1 w10: D2.2 5370,2508.15 5423.15,2455 5423.15,2290 5457.83,2255.32 U4.24 5503.47,2255 v1(5648.15,2255) ; v1(5858.15,1820) 5858.15,1400 6003.15,1255 C4.2
  Signal Layer 2 w10: v1(5648.15,2255) 5858.15,2045 v1(5858.15,1820)
NetC8_1: C8.1 D4.2 L1.1 Q1.2 Q2.3@5739.69,1440 U4.15 | length 1691.7
  Signal Layer 1 w10: C8.1 5523.15,2320 v1(5533.15,2310) ; U4.15 5742.2,2025 L1.1@5788.15,2070.94 ; Q1.2 5704.33,1440 5739.69,1440 5789.53,1489.84 D4.2 5788.15,1701.38 v1(5788.15,1880) L1.1@5788.15,2070.94 ; L1.1 L1.1@5788.15,2070.94
  Signal Layer 2 w10: v1(5533.15,2310) 5788.15,2055 v1(5788.15,1880)
NetC8_2: C8.2 D3.2 U4.13 | length 562.9
  Signal Layer 1 w10: D3.2 5363.15,2321.85 C8.2 5365,2003.15 5394.33,1973.82 U4.13
NetC9_2: C9.2 U4.12 | length 74.9
  Signal Layer 1 w10: U4.12 5237.4,1902.6 C9.2
NetC10_2: C10.2 D2.1 D3.1 R5.1 U4.19 | length 987
  Signal Layer 1 w10: C10.2 D3.1 ; D2.1 5231.26,2508.15 D3.1 ; U4.19 5425.79,2127.36 5388.15,2165 5388.15,2205 5403.15,2220 5403.15,2450 5393.15,2460 5328.15,2460 5297.68,2429.53 R5.1 5231.26,2381.42 D3.1
NetC11_2: C11.2 U4.2 | length 126.2
  Signal Layer 1 w10: C11.2 5237.2,2229.53 U4.2
NetC12_1: C12.1 R8.1 U4.4 | length 303.1
  Signal Layer 1 w10: R8.1 C12.1 5083.15,2075 5186.69,2178.54 U4.4
NetC12_2: C12.2 R9.1 U4.3 | length 252.3
  Signal Layer 1 w10: R9.1 5008.98,2150.83 C12.2 5108.98,2150.83 5162.28,2204.13 U4.3
NetC13_2: C13.2 R6.1 | length 150.2
  Signal Layer 1 w10: C13.2 5032.32,1980.83 R6.1
NetC14_2: C14.2 R6.2 U4.5 | length 344
  Signal Layer 1 w10: C14.2 5102.68,1900.91 R6.2 5133.15,2000 5133.15,2095 5191.1,2152.95 U4.5
NetC15_2: C15.2 C16.1 D6.2 Q7.3@1968.46,1420 R12.1 R15.2 U5.1 | length 1395
  Signal Layer 1 w10: C16.1 2107.05,1170 D6.2 1968.46,1236.65 1968.46,1420 2068.46,1520 C15.2 2175.47,1590.47 R15.2 2380,1625.47 2380,1735 R12.1 2459.41,1705.59 U5.1
NetC19_1: C19.1 D6.1 L2.2 Q7.2 Q8.3@1410,1255 U6.22 | length 2246.7
  Signal Layer 1 w10: C19.1 1220,1445 Q8.3@1410,1255 ; D6.1 1543.19,1255 Q8.3@1410,1255 ; U6.22 2185.59,1814.65 L2.2 1700.39,1329.45 Q7.2 1484.45,1329.45 Q8.3@1410,1255
NetC19_2: C19.2 D8.2 U6.24 | length 1795.8
  Signal Layer 1 w10: C19.2 1220,1860 1340,1980 v1(1790,1980) ; v1(2236.77,2183.23) U6.24 2236.77,2401.77 2255,2420 2430,2420 D8.2
  Signal Layer 2 w10: v1(1790,1980) 2033.54,1980 v1(2236.77,2183.23)
NetC20_1: C20.1 D9.2 L2.1 Q5.3@1410,2103.46 Q6.2 U6.15 | length 1713.5
  Signal Layer 1 w10: Q6.2 1410,2137.28 1410,2103.46 1459.84,2053.62 D9.2 1661.38,2055 v1(1855,2055) L2.1@2035.94,2055 ; U6.15 2006.46,2084.49 L2.1@2035.94,2055 ; L2.1 L2.1@2035.94,2055 ; v1(2305,2315) C20.1
  Signal Layer 2 w10: v1(1855,2055) 2045,2055 v1(2305,2315)
NetC20_2: C20.2 D7.2 U6.13 | length 569.9
  Signal Layer 1 w10: U6.13 1955.28,2465.28 1978.23,2488.23 2304.92,2488.23 C20.2 2399.09,2488.15 D7.2
NetC21_2: C21.2 U6.12 | length 81.4
  Signal Layer 1 w10: C21.2 1952.68,2613.15 U6.12
NetC22_2: C22.2 D7.1 D8.1 R14.1 U6.19 | length 1047.6
  Signal Layer 1 w10: U6.19 2108.82,2428.82 2150,2470 2215,2470 2240,2445 2430,2445 2440,2455 2440,2530 2414.53,2555.47 R14.1 2355.47,2620.94 D7.1 ; C22.2 2400,2746.85 D7.1 ; D8.1 2499.06,2620.94 D7.1
NetC23_2: C23.2 U6.2 | length 182.7
  Signal Layer 1 w10: U6.2 2215,2619.57 C23.2
NetC24_1: C24.1 R21.1 U6.4 | length 331.5
  Signal Layer 1 w10: R21.1 2035,2816.85 C24.1 2160,2691.85 U6.4
NetC24_2: C24.2 R17.1 U6.3 | length 298.1
  Signal Layer 1 w10: R17.1 2145,2816.85 C24.2 2143.15,2766.85 2185.59,2724.41 U6.3
NetC25_2: C25.2 R16.1 | length 153
  Signal Layer 1 w10: R16.1 1950,2971.85 C25.2
NetC26_2: C26.2 R16.2 U6.5 | length 381.2
  Signal Layer 1 w10: C26.2 1876.38,2785.47 R16.2 1975.47,2760 2065,2760 2134.41,2690.59 U6.5
NetC27_2: C27.2 C28.1 D11.2 Q11.3@3035,1941.54 R22.1 R25.2 U7.1 | length 1367.1
  Signal Layer 1 w10: C28.1 2790,1807.95 D11.2 2853.46,1941.54 3035,1941.54 3130,1846.54 C27.2 3210.47,1737.68 R25.2 3245.47,1540 3370.47,1540 R22.1 3336.65,1466.18 U7.1
NetC31_1: C31.1 D11.1 L3.2 Q11.2 Q12.3@2860,2505 U8.22 | length 2243.5
  Signal Layer 1 w10: D11.1 2860,2348.62 Q12.3@2860,2505 ; C31.1 3055,2700 Q12.3@2860,2505 ; U8.22 3440.24,1718.82 L3.2 2944.45,2214.61 Q11.2 2944.45,2420.55 Q12.3@2860,2505
NetC31_2: C31.2 D12.2 U8.24 | length 1803.9
  Signal Layer 1 w10: C31.2 3425,2700 3590,2535 v1(3590,2125) ; v1(3782.64,1667.64) U8.24 4012.36,1667.64 4035,1645 4035,1465 D12.2
  Signal Layer 2 w10: v1(3590,2125) 3590,1860.28 v1(3782.64,1667.64)
NetC32_1: C32.1 D14.2 L3.1 Q9.3@3698.46,2505 Q10.2 U8.15 | length 1741.9
  Signal Layer 1 w10: Q10.2 3795.63,2434.37 3725,2505 3698.46,2505 3658.62,2465.16 D14.2 3655,2256.38 v1(3655,2075) 3655,1885.94 L3.1 3668.9,1897.95 U8.15 ; v1(3915,1600) C32.1
  Signal Layer 2 w10: v1(3655,2075) 3655,1860 v1(3915,1600)
NetC32_2: C32.2 D13.2 U8.13 | length 569.1
  Signal Layer 1 w10: U8.13 4065.87,1949.13 4101.18,1913.82 4101.18,1608.03 C32.2 4093.15,1505.91 D13.2
NetC33_2: C33.2 U8.12 | length 76.4
  Signal Layer 1 w10: U8.12 4226.3,1950.43 C33.2
NetC34_2: C34.2 D12.1 D13.1 R24.1 U8.19 | length 1010.8
  Signal Layer 1 w10: U8.19 4039.41,1795.59 4070,1765 4070,1720 4050,1700 4050,1475 4060,1465 4125,1465 4165,1505 R24.1 4225.94,1554.06 D13.1 ; D12.1 4225.94,1405.94 D13.1 ; C34.2 D13.1
NetC35_2: C35.2 U8.2 | length 167.6
  Signal Layer 1 w10: U8.2 4226.77,1695 C35.2
NetC36_1: C36.1 R31.1 U8.4 | length 335.9
  Signal Layer 1 w10: U8.4 4290.62,1744.41 4350,1803.79 4350,1833.15 C36.1 4401.85,1885 R31.1
NetC36_2: C36.2 R27.1 U8.3 | length 284.8
  Signal Layer 1 w10: U8.3 4288.82,1718.82 4346.85,1776.85 C36.2 4483.15,1776.85 R27.1
NetC37_2: C37.2 R26.1 | length 157.2
  Signal Layer 1 w10: R26.1 4573.7,1975 C37.2
NetC38_2: C38.2 R26.2 U8.5 | length 398
  Signal Layer 1 w10: U8.5 4295,1770 4335,1810 4335,1929.53 R26.2 4398.7,1993.23 C38.2
NetC39_2: C39.2 D16.2 R33.1 R35.2 U9.1 | length 641.6
  Signal Layer 1 w10: R33.1 U9.1@4228.82,2771.18 ; U9.1 U9.1@4228.82,2771.18 ; C39.2 D16.2@4480,2718.15 ; R35.2 4480,2679.53 D16.2@4480,2718.15 ; U9.1@4228.82,2771.18 4228.82,2778.82 4245,2795 4436.42,2795 D16.2 D16.2@4480,2718.15
NetC40_2: C40.2 U10.32 | length 149.5
  Signal Layer 1 w10: U10.32 4785.16,2711.06 4860,2636.21 C40.2
NetC41_2: C41.2 R38.1 | length 66.2
  Signal Layer 1 w10: R38.1 4760,2600 C41.2
NetC42_2: C42.2 U10.28 | length 94.6
  Signal Layer 1 w10: C42.2 4700.51,2698.66 U10.28
NetC43_2: C43.2 D17.2 R40.1 R42.2 U11.1 | length 659.8
  Signal Layer 1 w10: C43.2 D17.2@2783.15,3300 ; R42.2 2754.53,3300 D17.2@2783.15,3300 ; U11.1 U11.1@2826.06,3580.59 ; R40.1 U11.1@2826.06,3580.59 ; D17.2@2783.15,3300 D17.2 2855,3328.58 2855,3570 2844.41,3580.59 U11.1@2826.06,3580.59
NetC44_2: C44.2 U12.32 | length 164.5
  Signal Layer 1 w10: C44.2 2735,2920 2809.84,2994.84 U12.32
NetC45_2: C45.2 R45.1 | length 73.3
  Signal Layer 1 w10: C45.2 2641.3,3035 R45.1
NetC46_2: C46.2 U12.28 | length 101.7
  Signal Layer 1 w10: C46.2 2793.66,3079.49 U12.28
NetD4_1: D4.1 Q2.2 Q4.2 R9.2 R10.2 R11.2 | length 2061
  Signal Layer 1 w10: R10.2 4812.68,2129.53 R11.2 4913.62,2184.53 R9.2 v1(4894.09,2095) ; v1(5963.15,1695) 6058.15,1695 D4.1 6063.15,1531.18 Q2.2 6243.62,1349.45 Q4.2
  Signal Layer 2 w10: v1(4894.09,2095) 5254.09,1735 5292.65,1735 5332.65,1695 v1(5963.15,1695)
NetD5_2: D5.2 R3.1 U4.8 | length 420
  Signal Layer 1 w10: R3.1 5148.19,1759.09 D5.2 5148.19,2015.04 5209.33,2076.18 U4.8
NetD9_1: D9.1 Q5.2 Q8.2 R17.2 R18.2 R19.2 | length 2151.8
  Signal Layer 1 w10: Q8.2 1319.45,1599.53 Q5.2 1659.37,1780.63 1660,1781.26 v1(1660,1920) ; v1(2090,3009.53) R17.2 2155,2964.53 R19.2 R18.2
  Signal Layer 2 w10: v1(1660,1920) 1660,2125 2090,2555 v1(2090,3009.53)
NetD10_2: D10.2 R13.1 U6.8 | length 431.9
  Signal Layer 1 w10: R13.1 1734.57,2709.96 D10.2 2010.04,2709.96 2057.64,2662.36 U6.8
NetD14_1: D14.1 Q9.2 Q12.2 R27.2 R28.2 R29.2 | length 2104.7
  Signal Layer 1 w10: Q12.2 3194.53,2595.55 Q9.2 3375.63,2269.37 D14.1 3390,2255 v1(3515,2255) ; v1(4590,1830) 4590,1820.94 R27.2 R29.2 R28.2
  Signal Layer 2 w10: v1(3515,2255) 3750,2255 4175,1830 v1(4590,1830)
NetD15_2: D15.2 R23.1 U8.8 | length 456.2
  Signal Layer 1 w10: U8.8 4261.77,1846.77 4319.96,1904.96 D15.2 4319.96,2185.43 R23.1
NetD16_1: D16.1 L4.2 U10.8 U10.9 U10.20 U10.21 U10.38 | length 656.9
  Signal Layer 1 w10: D16.1 4480,3010.24 L4.2 4700.51,2949.72 U10.20 U10.21 U10.8 U10.9
NetD17_1: D17.1 L5.2 U12.8 U12.9 U12.20 U12.21 U12.38 | length 686.4
  Signal Layer 1 w10: D17.1 3100,3300 L5.2 3059.49,3079.49 U12.20 U12.21 U12.8 U12.9
NetP2_3: P2.3 R1.2 U2.8 U13.8 | length 4113.4
  Signal Layer 1 w10: P2.3@5495,3320 5500,3325 P2.3
  Signal Layer 1 w15: U13.8@4457.05,1140 4555.47,1140 4653.9,1140 4752.32,1140 4850.75,1140 5115.75,1405 ; v1(4665,1405) 5115.75,1405 ; R1.2 5485.59,1340.59 U2.8 5446.06,1405 5115.75,1405 ; v1(5495,3180) P2.3@5495,3320
  Signal Layer 2 w15: v1(4665,1405) 4665,2350 v1(5495,3180)
NetP2_9: P2.9 U2.5 | length 2870.3
  Signal Layer 1 w10: U2.5 v1(5673.82,1263.82) ; v1(5995,2825) 5995,3230 P2.9
  Signal Layer 2 w10: v1(5673.82,1263.82) 6008.82,1263.82 6275,1530 6275,2594.1 6145,2724.1 6145,2740 6060,2825 v1(5995,2825)
NetP2_10: P2.10 U3.5 | length 834.3
  Signal Layer 1 w10: U3.5 6045,2618.5 6045,3180 P2.10
NetP2_11: P2.11 U5.5 | length 4794.7
  Signal Layer 1 w10: U5.5 v1(2595,1759.09) ; v1(3015,2795) v1(3135,2795)
  Signal Layer 2 w10: v1(2595,1759.09) 2595,2375 v1(3015,2795) ; v1(3135,2795) 3590,3250 6215,3250 P2.11
NetP2_12: P2.12 U7.5 | length 4773.9
  Signal Layer 1 w10: v1(3375,1440) 3425.59,1389.41 U7.5
  Signal Layer 2 w10: v1(3375,1440) 3140,1675 3140,2370 3995,3225 6290,3225 P2.12
NetP2_13: P2.13 U9.5 | length 2590.2
  Signal Layer 1 w10: U9.5 4305.59,2979.41 4280,3005 4280,3175 4520,3415 6410,3415 P2.13
NetP2_14: P2.14 U11.5 | length 3667
  Signal Layer 1 w10: U11.5 6421.18,3503.82 P2.14
NetQ5_1: Q5.1 U6.16 | length 1205.1
  Signal Layer 1 w10: Q5.1 1345.08,1755 v1(1410,1755) ; U6.16 v1(2032.05,2417.05)
  Signal Layer 2 w10: v1(1410,1755) 1610,1755 1700,1845 1700,2085 v1(2032.05,2417.05)
NetQ6_1: Q6.1 U6.14 | length 668.2
  Signal Layer 1 w10: Q6.1 1521.61,2430 1915,2430 1930,2415 1930,2320 1945,2305 1970,2305 1980.87,2315.87 U6.14
NetQ7_1: Q7.1 U6.23 | length 1101.2
  Signal Layer 1 w10: Q7.1 1645.63,1520.63 v1(1765,1640) ; U6.23 2211.18,2207.14 2201.77,2197.73 2201.77,2143.23 v1(2235,2110)
  Signal Layer 2 w10: v1(1765,1640) v1(2235,2110)
NetQ8_1: Q8.1 U6.18 | length 1220
  Signal Layer 1 w10: Q8.1 1500.55,1615.55 v1(1565,1680) ; U6.18 v1(2083.23,2453.23)
  Signal Layer 2 w10: v1(1565,1680) 1565,1688.79 1715,1838.79 1715,2035 2083.23,2403.23 v1(2083.23,2453.23)
NetQ9_1: Q9.1 U8.16 | length 1222.3
  Signal Layer 1 w10: v1(3355,2505) 3355,2574.92 Q9.1 ; U8.16 v1(4027.64,1872.36)
  Signal Layer 2 w10: v1(3355,2505) 3355,2300 3440,2215 3685,2215 v1(4027.64,1872.36)
NetQ10_1: Q10.1 U8.14 | length 673.3
  Signal Layer 1 w10: U8.14 3926.46,1923.54 3915,1935 3915,1955 3930,1970 4020,1970 4040,1990 4040,2384.92 Q10.1
NetQ11_1: Q11.1 U8.23 | length 1113.1
  Signal Layer 1 w10: Q11.1 3125.55,2244.45 v1(3220,2150) ; v1(3705,1665) 3742.64,1702.64 3797.14,1702.64 3806.54,1693.23 U8.23
  Signal Layer 2 w10: v1(3220,2150) v1(3705,1665)
NetQ12_1: Q12.1 U8.18 | length 1269.6
  Signal Layer 1 w10: Q12.1 3182.83,2357.17 v1(3200,2340) ; U8.18 v1(4066.18,1821.18)
  Signal Layer 2 w10: v1(3200,2340) 3365,2175 3625,2175 3978.82,1821.18 v1(4066.18,1821.18)
NetR2_2: R2.2 U3.8 U13.7 | length 2655.9
  Signal Layer 1 w10: U3.8 U3.8@6005.94,2494.96
  Signal Layer 1 w20: U13.7@4457.05,1238.43 4555.47,1238.43 4653.9,1238.43 4752.32,1238.43 U13.7@4850.75,1238.43 ; v1(5845,2450) R2.2 U3.8@6005.94,2494.96
  Signal Layer 2 w20: U13.7@4752.32,1238.43 4752.32,2017.32 5185,2450 v1(5845,2450)
NetR4_1: R4.1 R7.2 U4.6 | length 1043.3
  Signal Layer 1 w10: U4.6 5280.51,2127.36 v1(5308.15,2155) ; v1(5973.15,2385) 6117.68,2385 R7.2 6173.15,2385.47 R4.1
  Signal Layer 2 w10: v1(5308.15,2155) 5538.15,2385 v1(5973.15,2385)
NetR5_2: R5.2 U4.1 | length 60.2
  Signal Layer 1 w10: U4.1 5237.4,2313.78 R5.2
NetR12_2: R12.2 U5.8 U13.6 | length 2842.9
  Signal Layer 1 w10: 2450,1817.91 U5.8
  Signal Layer 1 w45: 2448.86,1819.06 R12.2 2405,1900 2440,1935 2565,1935 2685,1815 2685,1310 2935,1060 3955,1060 3984.61,1089.61 3984.61,1140 4083.03,1140 4181.46,1140 4279.88,1140 U13.6@4378.31,1140
NetR14_2: R14.2 U6.1 | length 53.7
  Signal Layer 1 w10: U6.1 2288.78,2615.75 R14.2
NetR15_1: R15.1 R20.2 U6.6 | length 1073.1
  Signal Layer 1 w10: U6.6 2108.82,2571.18 v1(2135,2545) ; R15.1 2350.94,1655.47 R20.2 ; R20.2@2350,1695.47 v1(2350,1920)
  Signal Layer 2 w10: v1(2135,2545) 2350,2330 v1(2350,1920)
NetR22_2: R22.2 U7.8 U13.5 | length 1145
  Signal Layer 1 w10: U7.8 3447.91,1485
  Signal Layer 1 w50: 3447.91,1485 3449.53,1486.61 R22.2 3780,1520 3984.61,1315.39 3984.61,1238.43 4083.03,1238.43 4181.46,1238.43 4279.88,1238.43 U13.5@4378.31,1238.43
NetR24_2: R24.2 U8.1 | length 53
  Signal Layer 1 w10: R24.2 4224.06,1666.69 U8.1
NetR25_1: R25.1 R30.2 U8.6 | length 1071.7
  Signal Layer 1 w10: R25.1 3319.53,1575 R30.2 3329.53,1565 3349.53,1585 v1(3535,1585) ; v1(4150,1770) 4175.59,1795.59 U8.6
  Signal Layer 2 w10: v1(3535,1585) 3880.5,1585 3900.5,1565 3945,1565 v1(4150,1770)
NetR33_2: R33.2 U9.8 U13.4 | length 3453.3
  Signal Layer 1 w10: U13.4@3512.17,1140 3610.59,1140 3709.02,1140 3807.44,1140 U13.4@3905.87,1140 ; v1(4175,3005) R33.2 4228.82,2937.87 U9.8
  Signal Layer 2 w10: U13.4@3905.87,1140 3855,1190.87 3855,1295 3890,1330 4405,1330 4630,1555 4630,2820 4445,3005 v1(4175,3005)
NetR34_1: R34.1 R36.2 U10.25 | length 118
  Signal Layer 1 w10: R36.2 R34.1 4638.74,2816.26 U10.25
NetR35_1: R35.1 R39.2 U10.31 | length 430.4
  Signal Layer 1 w10: R39.2 4530.47,2570 R35.1 4574.53,2615 4695,2615 4725,2645 4765,2645 4780,2660 4780,2695 4765.47,2709.53 U10.31
NetR37_2: R37.2 U10.33 | length 182.7
  Signal Layer 1 w10: U10.33 4804.84,2712.58 4857.43,2660 4886.01,2660 4926.49,2619.53 R37.2
NetR38_2: R38.2 U10.30 | length 57.9
  Signal Layer 1 w10: R38.2 4745,2730.83 U10.30
NetR40_2: R40.2 U11.8 U13.3 | length 3196.9
  Signal Layer 1 w10: U11.8 2983.94,3580.59 R40.2 3065,3630 v1(3070,3635)
  Signal Layer 1 w20: U13.3@3512.17,1238.43 3610.59,1238.43 3709.02,1238.43 3807.44,1238.43 U13.3@3905.87,1238.43
  Signal Layer 2 w20: v1(3070,3635) 3070,1680.59 U13.3@3512.17,1238.43
NetR41_1: R41.1 R43.2 U12.25 | length 129.4
  Signal Layer 1 w10: U12.25 2911.26,3136.73 R41.1 R43.2
NetR42_1: R42.1 R46.2 U12.31 | length 449.1
  Signal Layer 1 w10: R46.2 2640.95,3254.53 R42.1 2730,3165.47 2730,3010 2740,3000 2785,3000 2799.53,3014.53 U12.31
NetR44_2: R44.2 U12.33 | length 196.7
  Signal Layer 1 w10: R44.2 2760,2900.47 2760,2923.79 2811.37,2975.16 U12.33
NetR45_2: R45.2 U12.30 | length 67.4
  Signal Layer 1 w10: R45.2 2760.32,3034.21 U12.30
NetU10_3: U10.3 U10.6 | length 108.9
  Signal Layer 1 w10: U10.3 4906.57,2796.57 4920,2810 4920,2850 4914.37,2855.63 U10.6
NetU12_3: U12.3 U12.6 | length 108.9
  Signal Layer 1 w10: U12.3 2891.57,2868.43 2900,2860 2940,2860 2950.63,2870.63 U12.6
TG1-9V: Q3.1 U4.23 | length 1085.7
  Signal Layer 1 w10: U4.23 5623.93,2229.72 5634.52,2219.13 5697.28,2219.13 v1(5733.15,2255) ; v1(6218.15,1770) 6228.23,1770 Q3.1
  Signal Layer 2 w10: v1(5733.15,2255) v1(6218.15,1770)
TG2-9V: Q1.1 U4.14 | length 663.2
  Signal Layer 1 w10: Q1.1 5418.15,1545.08 5418.15,1915 5438.15,1935 5533.15,1935 5553.15,1955 5553.15,1985 5538.74,1999.41 U4.14
pads on no net: P1.1 P1.2 P1.3 P1.4 P1.5 P1.7 P1.8 P1.9 P1.10 P1.11 P1.12 P1.13 P1.14 P1.15 P1.16 P1.17 P2.1 P2.2 P2.5 P2.6 P2.7 P2.8 P2.15 P2.16 P2.17 Q1.3@5548.15,1545 Q2.3@6023.15,1440 Q3.3@6418.15,1710 Q4.3@6298.15,1440 Q5.3@1410,1820 Q6.3@1516.54,2295 Q7.3@1685,1420 Q8.3@1410,1538.46 Q9.3@3415,2505 Q10.3@3900,2395 Q11.3@3035,2225 Q12.3@3143.46,2505 U2.2 U2.3 U2.6 U2.7 U3.2 U3.3 U3.6 U3.7 U5.2 U5.3 U5.6 U5.7 U7.2 U7.3 U7.6 U7.7 U9.2 U9.3 U9.6 U9.7 U11.2 U11.3 U11.6 U11.7

## Polygon pours and split planes (outlines as drawn)
14.8V on Power Plane (split plane): 6979.9,1020.1 1020.1,1020.1 1020.1,3829.9 6979.9,3829.9
GND on Ground Plane (split plane): 6979.9,1020.1 1020.1,1020.1 1020.1,3829.9 6979.9,3829.9

## Silkscreen, mask and mechanical layers (free items; w line width, h text height)
Top Overlay:
  text "+-" at 2380,2585 h30 r270
  text "+-" at 2485,2585 h30 r270
  text "12V" at 1255,2505 h100
  text "+-" at 5280,2500 h30
  text "9V" at 5595,2485 h100
  text "+-" at 5270,2400 h30
  text "+-" at 4185,1520 h30 r180
  text "+-" at 4185,1420 h30 r180
  text "19V" at 3645,1395 h100
  text "5V" at 5635.47,1120 h100

## Text inside footprints (layer, text, board x,y; h text height)
L1: Top Overlay "2" at 6156.38,2208.86 h60; Top Overlay "1" at 5786.3,2208.86 h60; Top Overlay "1" at 5786.3,2208.86 h60
L2: Top Overlay "2" at 2173.86,1686.77 h60 r270; Top Overlay "1" at 2173.86,2056.85 h60 r270; Top Overlay "1" at 2173.86,2056.85 h60 r270
L3: Top Overlay "2" at 3291.77,1751.14 h60 r180; Top Overlay "1" at 3661.85,1751.14 h60 r180; Top Overlay "1" at 3661.85,1751.14 h60 r180
L4: Top Overlay "2" at 4552.13,3239.06 h60 r270; Top Overlay "1" at 4554.88,3611.89 h60 r270
L5: Top Overlay "2" at 3338.82,3217.87 h60 r180; Top Overlay "1" at 3711.65,3215.12 h60 r180
U10: Top Overlay "1" at 4868.82,2757.2 h9.84 r90
U12: Top Overlay "1" at 2852.2,2911.18 h9.84